# Altium PCB Board_Single.PcbDoc
Units mil, origin at the board's own origin, x right, y up, seen from the top; angles counter-clockwise.
Board outline 3629.92 x 2881.89 mil, 2 copper layers (Top Layer, Bottom Layer), stack 61.811 mil thick; 50 components, 21 nets, 218 pads, 36 vias.
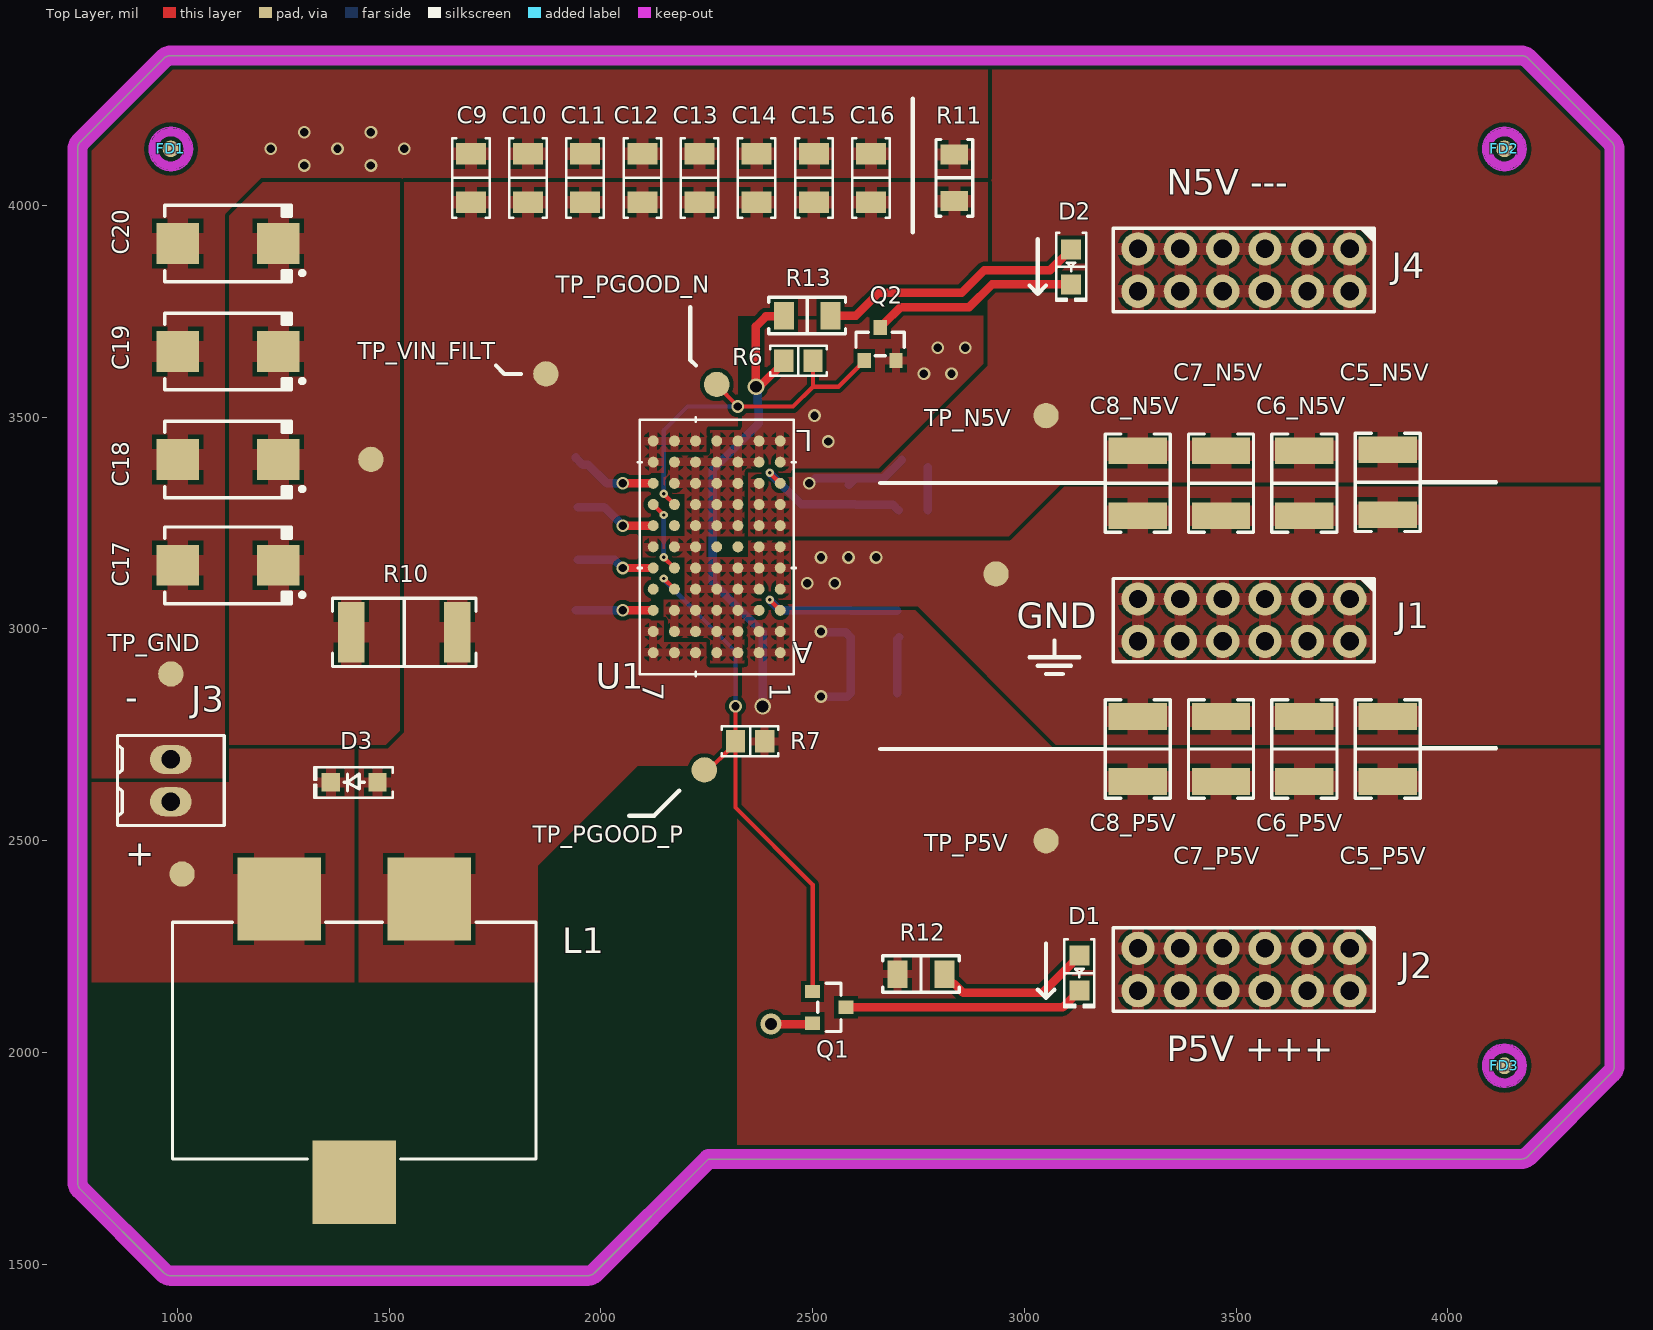
[diagram p0: Top Layer view]
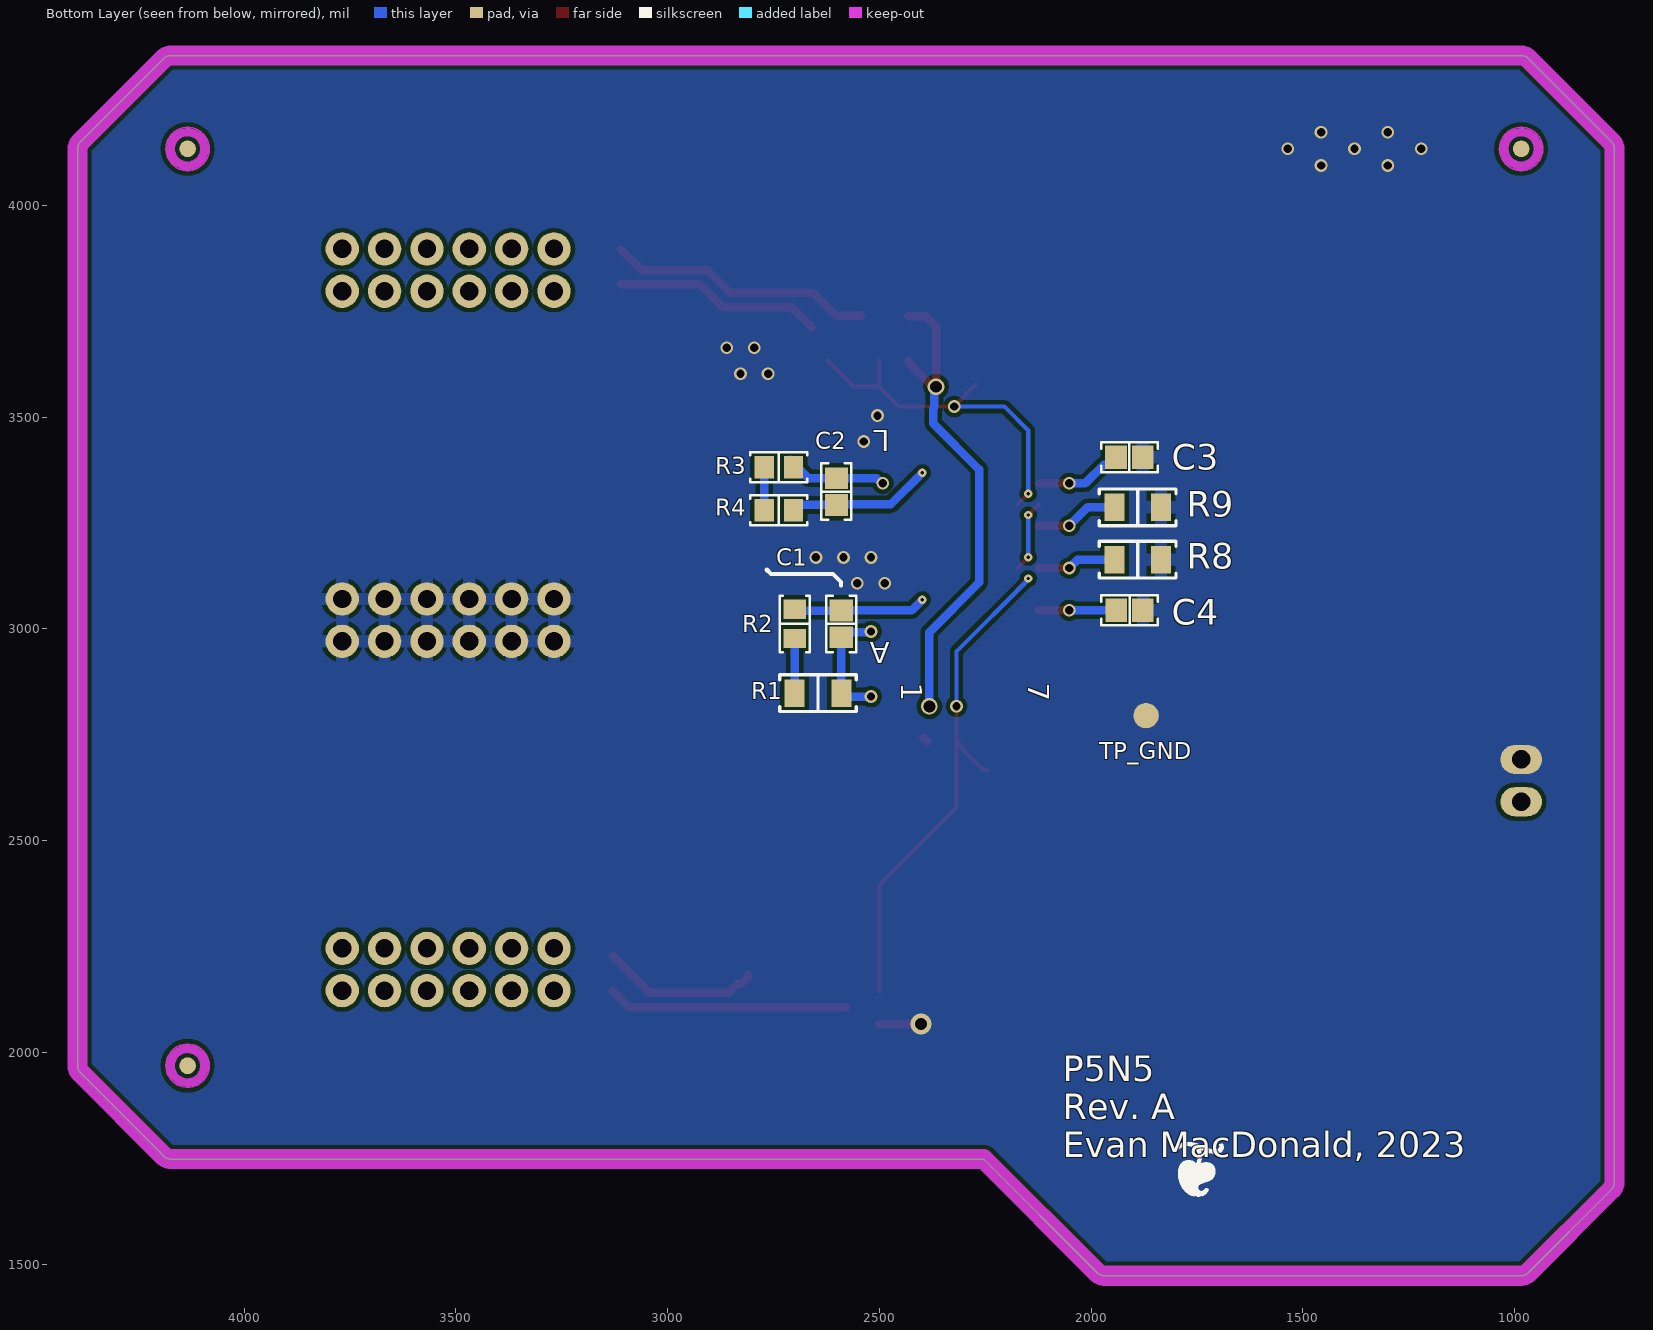
[diagram p1: Bottom Layer view, seen from below]
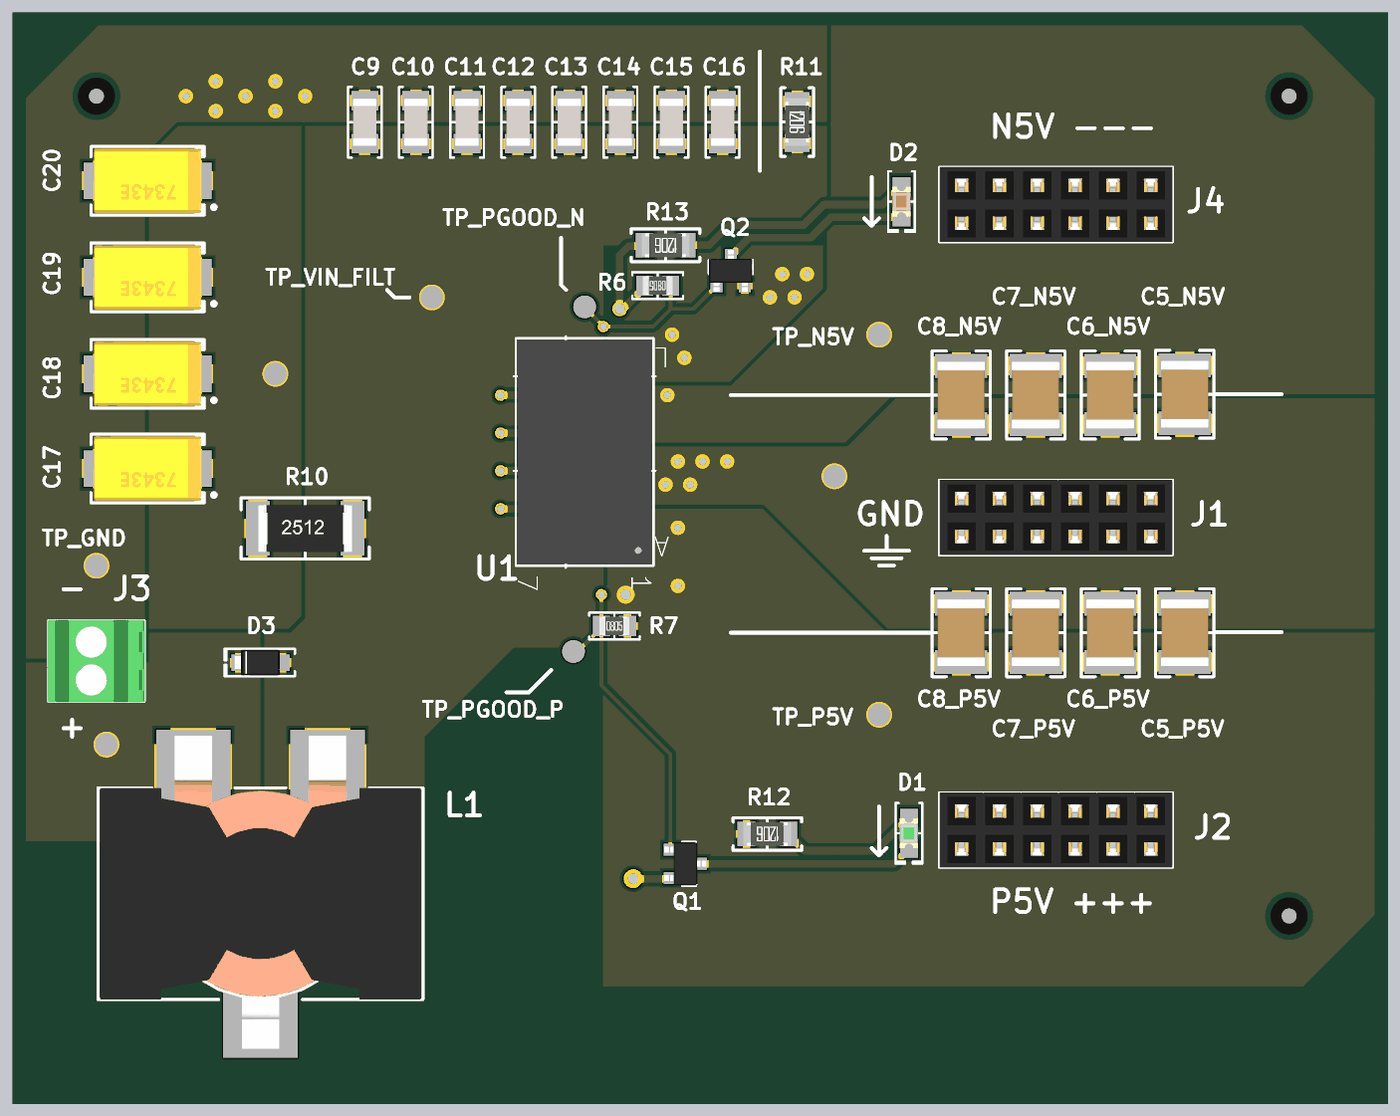
[diagram p2: 3D render of the assembled board from above, using the file's embedded part models]
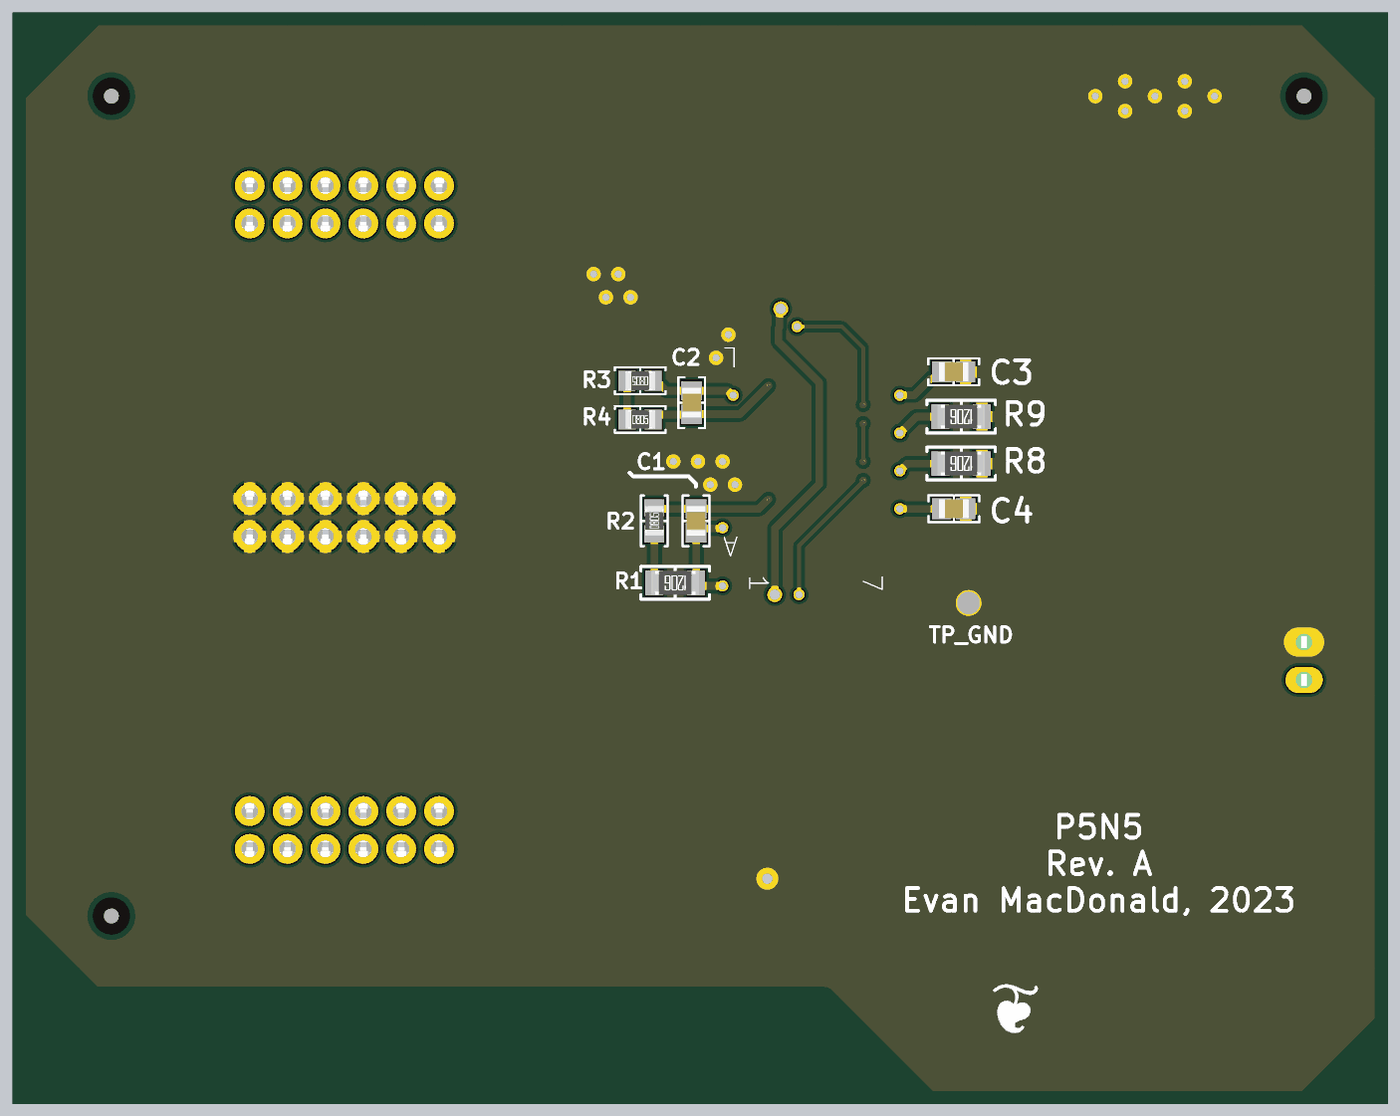
[diagram p3: 3D render of the assembled board from below, using the file's embedded part models]

## Layer stack, top to bottom
Top Solder: solder mask 0.5, Solder Resist, Dk 3.8
Top Layer: signal copper 1.378
Dielectric: core 59.0551, FR-4, Dk 4.5
Bottom Layer: signal copper 1.378
Bottom Solder: solder mask 0.5, Solder Resist, Dk 3.8

## Board outline
967.55,1479.36 770.7,1676.21 cw(c787.4,1692.91) 763.78,1692.91 763.78,4133.86 cw(c787.4,4133.86) 770.7,4150.56 967.55,4347.41 cw(c984.25,4330.71) 984.25,4354.33 4173.23,4354.33 cw(c4173.23,4330.71) 4189.93,4347.41 4386.78,4150.56 cw(c4370.08,4133.86) 4393.7,4133.86 4393.7,1968.5 cw(c4370.08,1968.5) 4386.78,1951.8 4189.93,1754.95 cw(c4173.23,1771.65) 4173.23,1748.03 2253.88,1748.03 1985.21,1479.36 cw(c1968.5,1496.06) 1968.5,1472.44 984.25,1472.44 cw(c984.25,1496.06)

## Design rules (kind name [scope] priority, off if disabled: settings)
BoardOutlineClearance [All] p1: gap=10 ignorepadtopadclearanceinfootprint=FALSE except(0: Arc-SplitContinuation Track-SplitContinuation SMDPad-SplitContinuation THPad-SplitContinuation Via-SplitContinuation Fill-SplitContinuation Poly-SplitContinuation Region-SplitContinuation Text-SplitContinuation)
Clearance [All] p1: gap=10 ignorepadtopadclearanceinfootprint=FALSE except(0: Arc-Hole Track-Hole SMDPad-Hole THPad-Hole Via-Hole Fill-Hole Poly-Hole Region-Hole Text-Hole; 5.91: SMDPad-Text)
HoleSize [All] p1: absolutevalues=TRUE maxlimit=248.03 minlimit=5.91 maxpercent=80.000 minpercent=20.000
MinimumAnnularRing [All] p1: minimumring=5.12
MinimumSolderMaskSliver [All] p1: minsoldermaskwidth=3.94
PolygonConnect [All] p1: connectstyle=Relief reliefconductorwidth=20 reliefentries=4 polygonreliefangle="90 Angle" airgapwidth=10
RoomDefinition Converter [InComponentClass('Converter') vs False] p1: confinementstyle=ConfineIn formatcopy=TRUE lockcomponents=FALSE outline 1618.94,2559.06 2885.43,2559.06 2885.43,3740.16 1618.94,3740.16
RoomDefinition TopLevel [InComponentClass('TopLevel')] p2: confinementstyle=ConfineIn formatcopy=TRUE lockcomponents=FALSE outline 472.44,1456.69 4547.24,1456.69 4547.24,4468.5 472.44,4468.5
RoomDefinition U_InputFilter [InComponentClass('U_InputFilter')] p3: confinementstyle=ConfineIn formatcopy=TRUE lockcomponents=FALSE outline 728.35,1535.43 2972.44,1535.43 2972.44,4370.08 728.35,4370.08
RoomDefinition U_LED_Feedback [InComponentClass('U_LED_Feedback')] p4: confinementstyle=ConfineIn formatcopy=TRUE lockcomponents=FALSE outline 2252.71,1948.82 3238.19,1948.82 3238.19,4015.75 2252.71,4015.75
RoomDefinition P5V [InComponentClass('P5V') vs False] p5: confinementstyle=ConfineIn formatcopy=TRUE lockcomponents=FALSE outline 3149.61,2559.06 3976.38,2559.06 3976.38,2874.02 3149.61,2874.02
RoomDefinition N5V [InComponentClass('N5V') vs False] p6: confinementstyle=ConfineIn formatcopy=TRUE lockcomponents=FALSE outline 3110.24,3188.98 4015.75,3188.98 4015.75,3543.31 3110.24,3543.31
RoutingVias [All] p1: holewidth=28 width=50 viastyle="Through Hole" minholewidth=5.91 minwidth=9.84 maxholewidth=248.03 maxwidth=257.87
SolderMaskExpansion [All] p1: expansion=4 istentingtop=FALSE
Width [All] p1: maxlimit=20 minlimit=5 preferedwidth=10 minimp=50.000000 maximp=50.000000 favimp=50.000000
28 further rules are at their usual default settings.

## Classes and differential pairs
channel class OutputFilter: N5V P5V
component class U_LED_Feedback: D1 D2 Q1 Q2 R12 R13
component class U_InputFilter: C9 C10 C11 C12 C13 C14 C15 C16 C17 C18 C19 C20 D3 L1 R10 R11
component class TopLevel: FD1 FD2 FD3 J1 J2 J3 J4
component class P5V: C5_P5V C6_P5V C7_P5V C8_P5V
component class N5V: C5_N5V C6_N5V C7_N5V C8_N5V
component class Converter: C1 C2 C3 C4 R1 R2 R3 R4 R6 R7 R8 R9 U1

## Components (designator, comment, footprint, x,y, rotation, side; value= is the part's Value field where it differs from the comment)
C1 "1000 pF" "CAP 0805_2012" 2589.76,3012 r90 bottom
C2 "1000 pF" "CAP 0805_2012" 2601.35,3324.33 r270 bottom
C3 "0.22 µF" "CAP 0805_2012" 1909.45,3405.51 r0 bottom
C4 "0.22 µF" "CAP 0805_2012" 1909.05,3044.02 r0 bottom
C5_N5V "22 µF" "CAP 1812_4532 1.1MM" 3858.27,3346.46 r90 top (schematic designator C5)
C5_P5V "22 µF" "CAP 1812_4532 1.1MM" 3858.27,2716.54 r270 top (schematic designator C5)
C6_N5V "22 µF" "CAP 1812_4532 1.1MM" 3661.42,3344.49 r90 top (schematic designator C6)
C6_P5V "22 µF" "CAP 1812_4532 1.1MM" 3661.42,2716.54 r270 top (schematic designator C6)
C7_N5V "22 µF" "CAP 1812_4532 1.1MM" 3464.57,3344.49 r90 top (schematic designator C7)
C7_P5V "22 µF" "CAP 1812_4532 1.1MM" 3464.57,2716.54 r270 top (schematic designator C7)
C8_N5V "22 µF" "CAP 1812_4532 1.1MM" 3267.72,3344.49 r90 top (schematic designator C8)
C8_P5V "22 µF" "CAP 1812_4532 1.1MM" 3267.72,2716.54 r270 top (schematic designator C8)
C9 "4.7 µF" "CAP 1206_3216 - 0.8MM" 1692.91,4065.12 r270 top
C10 "4.7 µF" "CAP 1206_3216 - 0.8MM" 1827.9,4065.12 r270 top
C11 "4.7 µF" "CAP 1206_3216 - 0.8MM" 1962.88,4065.12 r270 top
C12 "4.7 µF" "CAP 1206_3216 - 0.8MM" 2097.86,4065.12 r270 top
C13 "4.7 µF" "CAP 1206_3216 - 0.8MM" 2232.85,4065.12 r270 top
C14 "4.7 µF" "CAP 1206_3216 - 0.8MM" 2367.83,4065.12 r270 top
C15 "4.7 µF" "CAP 1206_3216 - 0.8MM" 2502.81,4065.12 r270 top
C16 "4.7 µF" "CAP 1206_3216 - 0.8MM" 2637.8,4065.12 r270 top
C17 "68 µF" "CAP POL 2917_7343" 1119.25,3150.39 r180 top
C18 "68 µF" "CAP POL 2917_7343" 1119.25,3400.39 r180 top
C19 "68 µF" "CAP POL 2917_7343" 1119.25,3655.39 r180 top
C20 "68 µF" "CAP POL 2917_7343" 1119.25,3910.39 r180 top
D1 "Green" "LED 0805_2012 GREEN" 3129.92,2187.01 r270 top
D2 "Red" "LED 0805_2012 RED" 3110.24,3855.29 r270 top
D3 "PMEG40T30ERX" SOD-123W 1417.32,2637.8 r180 top
FD1 "Fiducial Marker" FIDUCIAL 984.25,4133.86 r0 top
FD2 "Fiducial Marker" FIDUCIAL 4133.86,4133.86 r0 top
FD3 "Fiducial Marker" FIDUCIAL 4133.86,1968.5 r0 top
J1 "M20-7830642" "HARWIN M20-7830645" 3518.5,3020.87 r270 top
J2 "M20-7830642" "HARWIN M20-7830645" 3518.5,2195.66 r270 top
J3 "282834-2" "TE 282834-2" 984.25,2641.96 r90 top
J4 "M20-7830642" "HARWIN M20-7830645" 3518.5,3847.64 r270 top
L1 "47 µH" "WURTH WE-HCF 14.5MM" 1417.32,2027.56 r180 top
Q1 "BC817-40-7-F" "DIODES SOT-23-3" 2539.37,2106.3 r0 top
Q2 "BC817-40-7-F" "DIODES SOT-23-3" 2659.45,3672.89 r90 top
R1 "45.3 kOhms" "RES 1206_3216" 2644.88,2848.53 r0 bottom
R2 "270 Ohms" "RES 0805_2012" 2700,3012.04 r90 bottom
R3 "51 kOhms" "RES 0805_2012" 2737.37,3382.31 r0 bottom
R4 "9.1 kOhms" "RES 0805_2012" 2737.37,3279.92 r180 bottom
R6 "10 kOhms" "RES 0805_2012" 2466.34,3633.52 r180 top
R7 "10 kOhms" "RES 0805_2012" 2352.2,2734.33 r0 top
R8 "80.6 kOhms" "RES 1206_3216" 1889.76,3163.49 r0 bottom
R9 "80.6 kOhms" "RES 1206_3216" 1889.76,3287.4 r0 bottom
R10 "1 Ohms" "RES 2512_6432" 1535.43,2992.13 r0 top
R11 "47 kOhms" "RES 1206_3216" 2834.65,4065.31 r270 top
R12 "150 Ohms" "RES 1206_3216" 2755.91,2185.04 r180 top
R13 "150 Ohms" "RES 1206_3216" 2487.01,3740.16 r180 top
U1 "LTM8049IY" LTM8049IY_ADI 2273.46,3194.02 r180 top

## Footprints (in the part's own frame and the unit in brackets; to place one, negate y for a bottom-side part, rotate by r counter-clockwise, add the part's x,y. Pads: shape width x height; smd on the part's side, far side on the other; paste and mask are expansions set on the pad)
"CAP 0805_2012" [mm] "Chip Capacitor, 2-Leads, Body 2.00x1.20mm, IPC Medium Density"
  rect 1.3x1.4 smd: 1(-0.8,0) 2(0.8,0)
  silkscreen extent -1.7,-0.9 1.7,0.9, body extent -1,-0.64 1,0.64, height 1.26
"CAP 1206_3216 - 0.8MM" [mm] "Chip Capacitor, 2-Leads, Body 3.25x1.60mm, IPC Medium Density"
  rect 1.3x1.8 smd: 1(-1.45,0) 2(1.45,0)
  silkscreen extent -2.37,-1.12 2.37,1.12, body extent -1.6,-0.8 1.6,0.8, height 0.8
"CAP 1812_4532 1.1MM" [mm] "Chip Capacitor, 2-Leads, Body 4.50x3.20mm, IPC Medium Density"
  rect 1.6x3.5 smd: 1(-1.95,0) 2(1.95,0)
  silkscreen extent -2.95,-1.95 2.95,1.95, body extent -2.25,-1.6 2.25,1.6, height 1.1
"CAP POL 2917_7343" [mm] "Molded Capacitor, 2-Leads, Body 7.30x4.30mm, IPC Medium Density"
  rect 2.55x2.45 smd: 1(-3.025,0) 2(3.025,0)
  silkscreen extent -4.58,-2.3 3.8,2.3, body extent -3.65,-2.15 3.65,2.15, height 4.1
"DIODES SOT-23-3" [mm] "SOT23, 3-Leads, Body 2.90x2.40mm, Pitch 0.95mm, IPC Medium Density"
  rect 0.9x0.8 smd: 1(-1,0.95) 2(-1,-0.95) 3(1,0)
  silkscreen extent -0.7,-1.45 0.7,1.45, body extent -1.41,-1.45 1.41,1.45, height 1.5
FIDUCIAL [mm] "Fiducial Marker"
  round 1 smd mask+0.75: 1(0,0)
  round 1 smd far side mask+0.75: 1(0,0)
  Keep-Out Layer circle w0.1: c0,0 r1.3
  Keep-Out Layer circle w0.496: c0,0 r1.002
"HARWIN M20-7830645" [mm] "2.54mm DIL PC TAIL PIN HEADER ASSEMBLY"
  round 2 hole 1.1: 1(-1.27,6.35) 2(-1.27,3.81) 3(-1.27,1.27) 4(-1.27,-1.27) 5(-1.27,-3.81) 6(-1.27,-6.35) 7(1.27,-6.35) 8(1.27,-3.81) 9(1.27,-1.27) 10(1.27,1.27) 11(1.27,3.81) 12(1.27,6.35)
  silkscreen extent -2.5,-7.83 2.5,7.81, body extent -2.52,-7.82 2.52,7.82, height 8.5
"LED 0805_2012 GREEN" [mm] "Chip Diode, 2-Leads, Body 2.00x1.25mm, IPC Medium Density"
  rect 1.2x1.2 smd: 1(-1.05,0) 2(1.05,0)
  silkscreen extent -2.03,-0.9 2.03,0.9, body extent -1,-0.63 1,0.63, height 0.9
"LED 0805_2012 RED" [mm] "Chip Diode, 2-Leads, Body 2.00x1.25mm, IPC Medium Density"
  rect 1.2x1.2 smd: 1(-1.05,0) 2(1.05,0)
  silkscreen extent -2.03,-0.9 2.03,0.9, body extent -1,-0.62 1,0.63, height 0.9
LTM8049IY_ADI [mil]
  round 26 smd paste+0 mask+0: A1(-150,250) A2(-100,250) A5(50,250) A6(100,250) A7(150,250) B1(-150,200) B2(-100,200) B7(150,200) C1(-150,150) C2(-100,150) C7(150,150) D1(-150,100) D2(-100,100) D6(100,100) D7(150,100) E1(-150,50) E2(-100,50) E6(100,50) E7(150,50) F3(-50,0) F4(0,0) G1(-150,-50) G2(-100,-50) G6(100,-50) G7(150,-50) H1(-150,-100) H2(-100,-100) H6(100,-100) H7(150,-100) J1(-150,-150) J2(-100,-150) J7(150,-150) K1(-150,-200) K2(-100,-200) K7(150,-200) L1(-150,-250) L2(-100,-250) L5(50,-250) L6(100,-250) L7(150,-250) R(-150,0) R(-100,0) R(-50,250) R(-50,150) R(-50,200) R(-50,100) R(-50,50) R(-50,-50) R(-50,-100) R(-50,-200) R(-50,-150) R(-50,-250) R(0,250) R(0,200) R(0,150) R(0,100) R(0,50) R(0,-50) R(0,-100) R(0,-150) R(0,-200) R(0,-250) R(50,150) R(50,200) R(50,100) R(50,50) R(50,0) R(50,-50) R(50,-100) R(50,-200) R(50,-150) R(100,200) R(100,150) R(100,0) R(100,-150) R(100,-200) R(150,0)
  silkscreen extent -187,-306 187,306, body extent -177,-296 177,296, height 103
"RES 0805_2012" [mm] "Chip Resistor, 2-Leads, Body 2.00x1.25mm, IPC Medium Density"
  rect 1.15x1.35 smd: 1(-0.875,0) 2(0.875,0)
  silkscreen extent -1.7,-0.9 1.7,0.9, body extent -1,-0.62 1,0.63, height 0.6
"RES 1206_3216" [mm] "Chip Resistor, 2-Leads, Body 3.13x1.55mm, IPC Medium Density"
  rect 1.2x1.65 smd: 1(-1.4,0) 2(1.4,0)
  silkscreen extent -2.3,-1.1 2.3,1.1, body extent -1.6,-0.8 1.6,0.8, height 0.6
"RES 2512_6432" [mm] "Chip Resistor, 2-Leads, Body 6.30x3.15mm, IPC Medium Density"
  rect 1.6x3.65 smd: 1(-3.175,0) 2(3.175,0)
  silkscreen extent -4.3,-2.05 4.3,2.05, body extent -3.15,-1.57 3.15,1.57, height 0.7
SOD-123W [mm] "SODFL, 2-Leads, Body 1.60x3.50mm, IPC Medium Density"
  rect 1.1x1.1 smd: 1(-1.4,0) 2(1.4,0)
  silkscreen extent -2.31,-0.92 2.41,0.92, body extent -1.75,-0.87 1.75,0.87, height 0.95
"TE 282834-2" [mm]
  oval 1.75x2.5 hole 1.1: 1(-1.27,0) 2(1.27,0)
  silkscreen extent -2.7,-3.2 2.7,3.2, body extent -2.77,-3.25 2.77,3.25, height 10
"WURTH WE-HCF 14.5MM" [mm] "SMD High Current Inductor, body 21.8x14.2mm"
  rect 5x5 smd: 1(-4.5,-8.5) 2(4.5,-8.5) 3(0,8.5)
  silkscreen extent -10.9,-7.1 10.9,7.1, body extent -10.75,-10.6 10.75,10.4, height 14

## Part data
C1 C2: library part C0805C102J5RAC7800, "CAP CER 1000PF 50V X7R 0805", Device Package="0805 (2012 Metric)", manufacturer=KEMET, Operating Temperature="-55°C ~ 125°C", Part Number=C0805C102J5RACTU, Supplier Part Number 1=399-C0805C102J5RAC7800CT-ND, Temperature Coefficient=X7R, Tolerance=±5%, Voltage - Rated=50V, Applications="Bypass, Decoupling", Capacitance="1000 pF", componentlink1description=Datasheet, componentlink1url=https://api.kemet.com/component-edge/download/datasheet/C0805C102J5RACTU.pdf, componentlink2description="DigiKey Link", componentlink2url=https://www.digikey.com/en/products/detail/kemet/C0805C102J5RAC7800/411148, lastupdated="7/15/2023 7:10:24 PM", Lifecycle Status=Active, Minimum Order=1, Mounting Type="Surface Mount, MLCC", Package / Case="0805 (2012 Metric)", packaging=TapeAndReel, Part Status=Active, partid=32561, price=0.01, series="SMD Comm X7R", Size / Dimension="0.079\" L x 0.049\" W (2.00mm x 1.25mm)", Supplier 1=DigiKey, Thickness (Max)="0.035\" (0.88mm)"
C3 C4: library part C0805C224K5RAC7800, "CAP CER 0.22UF 50V X7R 0805", Device Package="0805 (2012 Metric)", manufacturer=KEMET, Operating Temperature="-55°C ~ 125°C", Part Number=C0805C224K5RACTU, Supplier Part Number 1=399-C0805C224K5RACTUCT-ND, Temperature Coefficient=X7R, Tolerance=±10%, Voltage - Rated=50V, Applications="Bypass, Decoupling", Capacitance="0.22 µF", componentlink1description=Datasheet, componentlink1url=https://api.kemet.com/component-edge/download/datasheet/C0805C224K5RACTU.pdf, componentlink2description="DigiKey Link", componentlink2url=https://www.digikey.com/en/products/detail/kemet/C0805C224K5RAC7800/754753, lastupdated="7/15/2023 7:10:33 PM", Lifecycle Status=Active, Minimum Order=1, Mounting Type="Surface Mount, MLCC", Package / Case="0805 (2012 Metric)", packaging=TapeAndReel, Part Status=Active, partid=33070, price=0.02, series="SMD Comm X7R", Size / Dimension="0.079\" L x 0.049\" W (2.00mm x 1.25mm)", Supplier 1=DigiKey, Thickness (Max)="0.055\" (1.40mm)"
C5_N5V C5_P5V C6_N5V C6_P5V C7_N5V C7_P5V C8_N5V C8_P5V: library part CGA8P1X7R1E226M250KC, "CAP CER 22UF 25V X7R 1812", Device Package="1812 (4532 Metric)", manufacturer="TDK Corporation", Operating Temperature="-55°C ~ 125°C", Ratings=AEC-Q200, Supplier Part Number 1=445-7910-1-ND, Temperature Coefficient=X7R, Tolerance=±20%, Voltage - Rated=25V, Applications=Automotive, Capacitance="22 µF", componentlink1description=Datasheet, componentlink1url=https://product.tdk.com/info/en/catalog/datasheets/mlcc_automotive_general_en.pdf?ref_disty=digikey, componentlink2description="DigiKey Link", componentlink2url=https://www.digikey.com/en/products/detail/tdk-corporation/CGA8P1X7R1E226M250KC/2781336, lastupdated="7/15/2023 7:18:32 PM", Lifecycle Status=Active, Minimum Order=1, Mounting Type="Surface Mount, MLCC", Package / Case="1812 (4532 Metric)", packaging=TapeAndReel, Part Number=CGA8P1X7R1E226M250KC, Part Status=Active, price=0.42, series=CGA, Size / Dimension="0.177\" L x 0.126\" W (4.50mm x 3.20mm)", Supplier 1=DigiKey, Thickness (Max)="0.110\" (2.80mm)"
C9 C10 C11 C12 C13 C14 C15 C16: library part C1206C475K5RAC7800, "CAP CER 4.7UF 50V X7R 1206", Device Package="1206 (3216 Metric)", manufacturer=KEMET, Operating Temperature="-55°C ~ 125°C", Part Number=C1206C475K5RACTU, Supplier Part Number 1=399-C1206C475K5RAC7800CT-ND, Temperature Coefficient=X7R, Tolerance=±10%, Voltage - Rated=50V, Applications="Bypass, Decoupling", Capacitance="4.7 µF", componentlink1description=Datasheet, componentlink1url=https://api.kemet.com/component-edge/download/datasheet/C1206C475K5RACTU.pdf, componentlink2description="DigiKey Link", componentlink2url=https://www.digikey.com/en/products/detail/kemet/C1206C475K5RAC7800/5119822, lastupdated="7/15/2023 7:14:03 PM", Lifecycle Status=Active, Minimum Order=1, Mounting Type="Surface Mount, MLCC", Package / Case="1206 (3216 Metric)", packaging=TapeAndReel, Part Status=Active, partid=38858, price=0.07, series="SMD Comm X7R", Size / Dimension="0.126\" L x 0.063\" W (3.20mm x 1.60mm)", Supplier 1=DigiKey, Thickness (Max)="0.071\" (1.80mm)"
C17 C18 C19 C20: library part T491X686K025AT, "CAP TANT 68UF 10% 25V 2917", Device Package="2917 (7343 Metric)", ESR (Equivalent Series Resistance)=700mOhm, Lifetime @ Temp.="2000 Hrs @ 125°C", manufacturer=KEMET, Manufacturer Size Code=X, Operating Temperature="-55°C ~ 125°C", Supplier Part Number 1=399-8424-1-ND, Tolerance=±10%, Voltage - Rated="25 V", Capacitance="68 µF", componentlink1description=Datasheet, componentlink1url=https://api.kemet.com/component-edge/download/datasheet/T491X686K025AT.pdf, componentlink2description="DigiKey Link", componentlink2url=https://www.digikey.com/en/products/detail/kemet/T491X686K025AT/2336396, Features="General Purpose", Height - Seated (Max)="0.169\" (4.30mm)", lastupdated="7/13/2023 7:40:28 PM", Lifecycle Status=Active, Minimum Order=1, Mounting Type="Surface Mount", Package / Case="2917 (7343 Metric)", packaging=TapeAndReel, Part Number=T491X686K025AT, Part Status=Active, partid=3138, price=0.74, series=T491, Size / Dimension="0.287\" L x 0.169\" W (7.30mm x 4.30mm)", Supplier 1=DigiKey, Type=Molded
D1: library part CMD17-21VGD/TR8, "LED GREEN DIFFUSED 0805 SMD", Current - Test=20mA, Device Package="0805 (2012 Metric)", manufacturer="Visual Communications Company - VCC", Millicandela Rating=7mcd, Supplier Device Package=0805, Supplier Part Number 1=L62505CT-ND, Voltage - Forward (Vf) (Typ)=2.1V, Color=Green, componentlink1description=Datasheet, componentlink1url=https://vcclite.com/wp-content/uploads/wpallimport/files/files/CMD1721Seriesver3.pdf, componentlink2description="DigiKey Link", componentlink2url=https://www.digikey.com/en/products/detail/visual-communications-company-vcc/CMD17-21VGD-TR8/254855, Configuration=Standard, Height (Max)=1.20mm, lastupdated="7/12/2023 8:17:31 PM", Lens Color=Green, Lens Size="1.40mm x 1.25mm", Lens Style="Rectangle with Flat Top", Lens Transparency=Diffused, Lifecycle Status=Active, Minimum Order=1, Mounting Type="Surface Mount", Package / Case="0805 (2012 Metric)", packaging=TapeAndReel, Part Number=CMD17-21VGD/TR8, Part Status=Active, partid=299, price=0.19, series=CMD17-21, Size / Dimension="2.00mm L x 1.25mm W", Supplier 1=DigiKey, Viewing Angle=140°, Wavelength - Peak=570nm
D2: library part CMD17-21VRD/TR8, "LED RED DIFFUSED 0805 SMD", Current - Test=20mA, Device Package="0805 (2012 Metric)", manufacturer="Visual Communications Company - VCC", Millicandela Rating=6mcd, Supplier Device Package=0805, Supplier Part Number 1=L62501CT-ND, Voltage - Forward (Vf) (Typ)=2V, Color=Red, componentlink1description=Datasheet, componentlink1url=https://vcclite.com/wp-content/uploads/wpallimport/files/files/CMD1721Seriesver3.pdf, componentlink2description="DigiKey Link", componentlink2url=https://www.digikey.com/en/products/detail/visual-communications-company-vcc/CMD17-21VRD-TR8/254853, Configuration=Standard, Height (Max)=1.20mm, lastupdated="7/12/2023 8:17:11 PM", Lens Color=Red, Lens Size="1.40mm x 1.25mm", Lens Style="Rectangle with Flat Top", Lens Transparency=Diffused, Lifecycle Status=Active, Minimum Order=1, Mounting Type="Surface Mount", Package / Case="0805 (2012 Metric)", packaging=TapeAndReel, Part Number=CMD17-21VRD/TR8, Part Status=Active, partid=366, price=0.21, series=CMD17-21, Size / Dimension="2.00mm L x 1.25mm W", Supplier 1=DigiKey, Viewing Angle=140°, Wavelength - Peak=640nm
D3: "DIODE SCHOTTKY 40V 3A SOD123W", Capacitance @ Vr, F="560pF @ 1V, 1MHz", Current - Average Rectified (Io)=3A, Current - Reverse Leakage @ Vr="28 µA @ 40 V", manufacturer="Nexperia USA Inc.", Operating Temperature - Junction="175°C (Max)", Package / Case=SOD-123W, Supplier Part Number 1=1727-7481-1-ND, Voltage - DC Reverse (Vr) (Max)="40 V", Voltage - Forward (Vf) (Max) @ If="460 mV @ 3 A", componentlink1description=Datasheet, componentlink1url=https://assets.nexperia.com/documents/data-sheet/PMEG40T30ER.pdf, componentlink2description="DigiKey Link", componentlink2url=https://www.digikey.com/en/products/detail/nexperia-usa-inc/PMEG40T30ERX/7794686, Diode Type=Schottky, lastupdated="8/5/2023 9:09:43 PM", Lifecycle Status=Active, Minimum Order=1, Mounting Type="Surface Mount", packaging=TapeAndReel, Part Number=PMEG40T30ERX, Part Status=Active, partid=3171, price=0.10, Reverse Recovery Time (trr)="18 ns", series="Automotive, AEC-Q101", Speed="Fast Recovery =< 500ns, > 200mA (Io)", Supplier 1=DigiKey, Supplier Device Package=SOD-123W
FD1 FD2 FD3: library part Fiducial
J1 J2 J4: "CONN RCPT 12POS 0.1 GOLD PCB", Current Rating (Amps)=3A, Insulation Color=Black, manufacturer="Harwin Inc.", Material Flammability Rating="UL94 V-0", Operating Temperature="-40°C ~ 105°C", Supplier Part Number 1=952-1805-ND, componentlink1description=Datasheet, componentlink1url=https://cdn.harwin.com/pdfs/C001XX_M20_Series_Connectors.pdf, componentlink2description="DigiKey Link", componentlink2url=https://www.digikey.com/en/products/detail/harwin-inc/M20-7830642/3727774, Connector Type=Receptacle, Contact Finish - Mating=Gold, Contact Finish - Post=Tin, Contact Finish Thickness - Mating=Flash, Contact Length - Post="0.118\" (3.00mm)", Contact Type="Female Socket", Fastening Type=Push-Pull, Insulation Height="0.335\" (8.51mm)", lastupdated="9/21/2022 7:05:46 PM", Lifecycle Status=Active, Mated Stacking Heights="11.04mm, 12.63mm", Minimum Order=1, Mounting Type="Through Hole", Number of Positions=12, Number of Positions Loaded=All, Number of Rows=2, packaging=Tube, Part Number=M20-7830642, Part Status=Active, Pitch - Mating="0.100\" (2.54mm)", price=0.96, Row Spacing - Mating="0.100\" (2.54mm)", series=M20, Style="Board to Board or Cable", Supplier 1=DigiKey, Termination=Solder
J3: "TERM BLK 2P SIDE ENT 2.54MM PCB", Color=Green, Current=10A, manufacturer="TE Connectivity AMP Connectors", Supplier Part Number 1=A98333-ND, Voltage=150V, componentlink1description=Datasheet, componentlink1url=https://www.te.com/commerce/DocumentDelivery/DDEController?Action=srchrtrv&DocNm=282834&DocType=Customer+Drawing&DocLang=English, componentlink2description="DigiKey Link", componentlink2url=http://digikey.com/product-detail/en/te-connectivity-amp-connectors/282834-2/A98333-ND/1150135, lastupdated="1/15/2020 4:15:38 AM", Lifecycle Status=Active, Mating Orientation="Horizontal with Board", Minimum Order=1, Mounting Type="Through Hole", Number of Levels=1, packaging=Bulk, Part Number=282834-2, Part Status=Active, Pitch="0.100\" (2.54mm)", Positions Per Level=2, price=0.88, series=Buchanan, Supplier 1=DigiKey, Wire Gauge="16-30 AWG", Wire Termination="Screw - Rising Cage Clamp"
L1: library part 7443634700, "FIXED IND 47UH 12A 12.2 MOHM SMD", Current - Saturation=8.5A, Current Rating (Amps)="12 A", DC Resistance (DCR)=12.2mOhm, Device Package=Nonstandard, Frequency - Self Resonant=10MHz, Inductance Frequency - Test="100 kHz", manufacturer="Würth Elektronik", Operating Temperature="-40°C ~ 125°C", Ratings=AEC-Q200, Supplier Part Number 1=732-2525-1-ND, Tolerance=±15%, componentlink1description=Datasheet, componentlink1url=https://katalog.we-online.de/pbs/datasheet/7443634700.pdf, componentlink2description="DigiKey Link", componentlink2url=https://www.digikey.com/en/products/detail/würth-elektronik/7443634700/2440342, Height - Seated (Max)="0.571\" (14.50mm)", Inductance="47 µH", lastupdated="7/12/2023 8:30:57 PM", Lifecycle Status=Active, Material - Core="Manganese Zinc Ferrite (MnZn)", Minimum Order=1, Mounting Type="Surface Mount", Package / Case=Nonstandard, packaging=TapeAndReel, Part Number=7443634700, Part Status=Active, partid=3230, price=4.84, series=WE-HCF, Shielding=Shielded, Size / Dimension="0.858\" L x 0.846\" W (21.80mm x 21.50mm)", Supplier 1=DigiKey, Type="Drum Core, Wirewound"
Q1 Q2: "TRANS NPN 45V 0.5A SOT23-3", Current - Collector (Ic) (Max)="500 mA", Current - Collector Cutoff (Max)=100nA, DC Current Gain (hFE) (Min) @ Ic, Vce="250 @ 100mA, 1V", Frequency - Transition=100MHz, manufacturer="Diodes Incorporated", Operating Temperature="-65°C ~ 150°C (TJ)", Package / Case="TO-236-3, SC-59, SOT-23-3", Power - Max="310 mW", Supplier Device Package=SOT-23-3, Supplier Part Number 1=BC817-40FDICT-ND, Voltage - Collector Emitter Breakdown (Max)="45 V", componentlink1description=Datasheet, componentlink1url=https://www.diodes.com/assets/Datasheets/ds11107.pdf, componentlink2description="DigiKey Link", componentlink2url=https://www.digikey.com/en/products/detail/diodes-incorporated/BC817-40-7-F/814998, lastupdated="8/6/2023 9:15:11 PM", Lifecycle Status=Active, Minimum Order=1, Mounting Type="Surface Mount", packaging=TapeAndReel, Part Number=BC817-40-7-F, Part Status=Active, partid=116, price=0.02, series="Automotive, AEC-Q101", Supplier 1=DigiKey, Transistor Type=NPN, Vce Saturation (Max) @ Ib, Ic="700mV @ 50mA, 500mA"
R1: library part ERA-8ARW4532V, "RES SMD 45.3KOHM 0.05% 1/4W 1206", Device Package="1206 (3216 Metric)", manufacturer="Panasonic Electronic Components", Operating Temperature="-55°C ~ 155°C", Power (Watts)="0.25W, 1/4W", Ratings=AEC-Q200, Supplier Device Package=1206, Supplier Part Number 1=P18856CT-ND, Temperature Coefficient=±10ppm/°C, Tolerance=±0.05%, componentlink1description=Datasheet, componentlink1url=https://industrial.panasonic.com/cdbs/www-data/pdf/RDM0000/AOA0000C307.pdf, componentlink2description="DigiKey Link", componentlink2url=https://www.digikey.com/en/products/detail/panasonic-electronic-components/ERA-8ARW4532V/5163072, Composition="Thin Film", Features="Automotive AEC-Q200", Height - Seated (Max)="0.028\" (0.70mm)", lastupdated="7/13/2023 7:33:23 PM", Lifecycle Status=Active, Minimum Order=1, Number of Terminations=2, Package / Case="1206 (3216 Metric)", packaging=TapeAndReel, Part Number=ERA-8ARW4532V, Part Status=Active, partid=46049, price=0.56, Resistance="45.3 kOhms", series=ERA-8A, Size / Dimension="0.126\" L x 0.063\" W (3.20mm x 1.60mm)", Supplier 1=DigiKey
R2: library part ERJ-PB6B2700V, "RES SMD 270 OHM 0.1% 1/4W 0805", Device Package="0805 (2012 Metric)", manufacturer="Panasonic Electronic Components", Operating Temperature="-55°C ~ 155°C", Power (Watts)="0.25W, 1/4W", Ratings=AEC-Q200, Supplier Device Package=0805, Supplier Part Number 1=P20527CT-ND, Temperature Coefficient=±50ppm/°C, Tolerance=±0.1%, componentlink1description=Datasheet, componentlink1url=https://industrial.panasonic.com/cdbs/www-data/pdf/RDM0000/AOA0000C328.pdf, componentlink2description="DigiKey Link", componentlink2url=https://www.digikey.com/en/products/detail/panasonic-electronic-components/ERJ-PB6B2700V/6213310, Composition="Thick Film", Features="Automotive AEC-Q200, Pulse Withstanding", Height - Seated (Max)="0.028\" (0.70mm)", lastupdated="8/6/2023 8:08:39 PM", Lifecycle Status=Active, Minimum Order=1, Number of Terminations=2, Package / Case="0805 (2012 Metric)", packaging=TapeAndReel, Part Number=ERJ-PB6B2700V, Part Status=Active, partid=31052, price=0.04, Resistance="270 Ohms", series=ERJ-PB6, Size / Dimension="0.079\" L x 0.049\" W (2.00mm x 1.25mm)", Supplier 1=DigiKey
R3: library part TNPW080551K0BEEA, "RES 51K OHM 0.1% 1/8W 0805", Device Package="0805 (2012 Metric)", manufacturer="Vishay Dale", Operating Temperature="-55°C ~ 155°C", Power (Watts)="0.125W, 1/8W", Ratings=AEC-Q200, Supplier Device Package=0805, Supplier Part Number 1=541-3220-1-ND, Temperature Coefficient=±25ppm/°C, Tolerance=±0.1%, componentlink1description=Datasheet, componentlink1url=http://www.vishay.com/docs/28758/tnpw_e3.pdf, componentlink2description="DigiKey Link", componentlink2url=https://www.digikey.com/en/products/detail/vishay-dale/TNPW080551K0BEEA/1607476, Composition="Thin Film", Features="Anti-Sulfur, Automotive AEC-Q200, Moisture Resistant", Height - Seated (Max)="0.022\" (0.55mm)", lastupdated="8/6/2023 8:07:38 PM", Lifecycle Status=Active, Minimum Order=1, Number of Terminations=2, Package / Case="0805 (2012 Metric)", packaging=TapeAndReel, Part Number=TNPW080551K0BEEA, Part Status=Active, partid=45487, price=0.16, Resistance="51 kOhms", series="TNPW e3", Size / Dimension="0.079\" L x 0.049\" W (2.00mm x 1.25mm)", Supplier 1=DigiKey
R4: library part TNPW08059K10BEEA, "RES 9.1K OHM 0.1% 1/8W 0805", Device Package="0805 (2012 Metric)", manufacturer="Vishay Dale", Operating Temperature="-55°C ~ 155°C", Power (Watts)="0.2W, 1/5W", Ratings=AEC-Q200, Supplier Device Package=0805, Supplier Part Number 1=541-9869-1-ND, Temperature Coefficient=±25ppm/°C, Tolerance=±0.1%, componentlink1description=Datasheet, componentlink1url=http://www.vishay.com/docs/28758/tnpw_e3.pdf, componentlink2description="DigiKey Link", componentlink2url=http://digikey.com/product-detail/en/vishay-dale/TNPW08059K10BEEA/541-9869-1-ND/9659137, Composition="Thin Film", Features="Anti-Sulfur, Automotive AEC-Q200, Moisture Resistant", Height - Seated (Max)="0.022\" (0.55mm)", lastupdated="8/6/2023 8:07:38 PM", Lifecycle Status=Active, Minimum Order=1, Number of Terminations=2, Package / Case="0805 (2012 Metric)", packaging=TapeAndReel, Part Number=TNPW08059K10BEEA, Part Status=Active, partid=45465, price=0.18, Resistance="9.1 kOhms", series="TNPW e3", Size / Dimension="0.079\" L x 0.049\" W (2.00mm x 1.25mm)", Supplier 1=DigiKey
R6 R7: library part RT0805FRE1310KL, "RES 10K OHM 1% 1/8W 0805", Device Package="0805 (2012 Metric)", manufacturer=Yageo, Operating Temperature="-55°C ~ 155°C", Power (Watts)="0.125W, 1/8W", Supplier Device Package=0805, Supplier Part Number 1=13-RT0805FRE1310KLCT-ND, Temperature Coefficient=±50ppm/°C, Tolerance=±1%, componentlink1description=Datasheet, componentlink1url=https://www.yageo.com/upload/media/product/productsearch/datasheet/rchip/PYu-RT_1-to-0.01_RoHS_L_13.pdf, componentlink2description="DigiKey Link", componentlink2url=https://www.digikey.com/en/products/detail/yageo/RT0805FRE1310KL/16982152, Composition="Thin Film", Features="Moisture Resistant", Height - Seated (Max)="0.024\" (0.60mm)", lastupdated="7/12/2023 7:50:22 PM", Lifecycle Status=Active, Minimum Order=1, Number of Terminations=2, Package / Case="0805 (2012 Metric)", packaging=TapeAndReel, Part Number=RT0805FRE1310KL, Part Status=Active, partid=76856, price=0.01, Resistance="10 kOhms", series=RT, Size / Dimension="0.079\" L x 0.049\" W (2.00mm x 1.25mm)", Supplier 1=DigiKey
R8 R9: library part ERA-8AEB8062V, "RES SMD 80.6K OHM 0.1% 1/4W 1206", Device Package="1206 (3216 Metric)", manufacturer="Panasonic Electronic Components", Operating Temperature="-55°C ~ 155°C", Power (Watts)="0.25W, 1/4W", Ratings=AEC-Q200, Supplier Device Package=1206, Supplier Part Number 1=P80.6KBCCT-ND, Temperature Coefficient=±25ppm/°C, Tolerance=±0.1%, componentlink1description=Datasheet, componentlink1url=https://industrial.panasonic.com/cdbs/www-data/pdf/RDM0000/AOA0000C307.pdf, componentlink2description="DigiKey Link", componentlink2url=https://www.digikey.com/en/products/detail/panasonic-electronic-components/ERA-8AEB8062V/3071179, Composition="Thin Film", Features="Automotive AEC-Q200", Height - Seated (Max)="0.028\" (0.70mm)", lastupdated="8/5/2023 7:52:37 PM", Lifecycle Status=Active, Minimum Order=1, Number of Terminations=2, Package / Case="1206 (3216 Metric)", packaging=TapeAndReel, Part Number=ERA-8AEB8062V, Part Status=Active, partid=42629, price=0.10, Resistance="80.6 kOhms", series=ERA-8A, Size / Dimension="0.126\" L x 0.063\" W (3.20mm x 1.60mm)", Supplier 1=DigiKey
R10: library part RHC2512FT1R00, "RES 1 OHM 1% 2W 2512", Device Package="2512 (6432 Metric)", manufacturer="Stackpole Electronics Inc", Operating Temperature="-55°C ~ 155°C", Power (Watts)=2W, Supplier Device Package=2512, Supplier Part Number 1=RHC2512FT1R00CT-ND, Temperature Coefficient=±100ppm/°C, Tolerance=±1%, componentlink1description=Datasheet, componentlink1url=https://www.seielect.com/catalog/sei-rhc.pdf, componentlink2description="DigiKey Link", componentlink2url=https://www.digikey.com/en/products/detail/stackpole-electronics-inc/RHC2512FT1R00/1646034, Composition="Thick Film", Features="Moisture Resistant", Height - Seated (Max)="0.028\" (0.70mm)", lastupdated="2/17/2022 6:29:24 PM", Lifecycle Status=Active, Minimum Order=1, Number of Terminations=2, Package / Case="2512 (6432 Metric)", packaging=TapeAndReel, Part Number=RHC2512FT1R00, Part Status=Active, price=0.35, Resistance="1 Ohms", series=RHC, Size / Dimension="0.248\" L x 0.126\" W (6.30mm x 3.20mm)", Supplier 1=DigiKey
R11: library part CRCW120647K0FKEA, "RES SMD 47K OHM 1% 1/4W 1206", Device Package="1206 (3216 Metric)", manufacturer="Vishay Dale", Operating Temperature="-55°C ~ 155°C", Power (Watts)="0.25W, 1/4W", Ratings=AEC-Q200, Supplier Device Package=1206, Supplier Part Number 1=541-47.0KFCT-ND, Temperature Coefficient=±100ppm/°C, Tolerance=±1%, componentlink1description=Datasheet, componentlink1url=http://www.vishay.com/docs/20035/dcrcwe3.pdf, componentlink2description="DigiKey Link", componentlink2url=https://www.digikey.com/en/products/detail/vishay-dale/CRCW120647K0FKEA/1176834, Composition="Thick Film", Features="Automotive AEC-Q200", Height - Seated (Max)="0.024\" (0.60mm)", lastupdated="8/5/2023 7:53:13 PM", Lifecycle Status=Active, Minimum Order=1, Number of Terminations=2, Package / Case="1206 (3216 Metric)", packaging=TapeAndReel, Part Number=CRCW120647K0FKEA, Part Status=Active, partid=33069, price=0.01, Resistance="47 kOhms", series=CRCW, Size / Dimension="0.126\" L x 0.063\" W (3.20mm x 1.60mm)", Supplier 1=DigiKey
R12 R13: library part RT1206FRE07150RL, "RES SMD 150 OHM 1% 1/4W 1206", Device Package="1206 (3216 Metric)", manufacturer=Yageo, Operating Temperature="-55°C ~ 155°C", Power (Watts)="0.25W, 1/4W", Supplier Device Package=1206, Supplier Part Number 1=13-RT1206FRE07150RLCT-ND, Temperature Coefficient=±50ppm/°C, Tolerance=±1%, componentlink1description=Datasheet, componentlink1url=https://www.yageo.com/upload/media/product/productsearch/datasheet/rchip/PYu-RT_1-to-0.01_RoHS_L_12.pdf, componentlink2description="DigiKey Link", componentlink2url=https://www.digikey.com/en/products/detail/yageo/RT1206FRE07150RL/1082930, Composition="Thin Film", Height - Seated (Max)="0.026\" (0.65mm)", lastupdated="7/12/2023 7:42:26 PM", Lifecycle Status=Active, Minimum Order=1, Number of Terminations=2, Package / Case="1206 (3216 Metric)", packaging=TapeAndReel, Part Number=RT1206FRE07150RL, Part Status=Active, partid=66998, price=0.01, Resistance="150 Ohms", series=RT, Size / Dimension="0.122\" L x 0.063\" W (3.10mm x 1.60mm)", Supplier 1=DigiKey
U1: "No Description Available", manufacturer="Analog Devices Inc", Part Number=LTM8049IY, RefDes=RefDes, Type=Type

## Free pads (board coordinates)
  round 60 smd: 2(984.25,2893.7) 2(1010.62,2421.26) 2(1456.69,3400.39) 2(1870.08,3602.36) 2(2244.09,2667.04) 2(2273.46,3577.47) 2(2933.07,3129.92) 2(3051.18,2500) 2(3051.18,3503.94)
  round 60 smd far side: 2(1870.08,2795.28)

## Via types
v1: diameter 30, hole 19.68, Top Layer to Bottom Layer, 27 vias
v2: diameter 19.68, hole 7.87, Top Layer to Bottom Layer, tented both sides, 6 vias
v3: diameter 39.37, hole 28, Top Layer to Bottom Layer, 2 vias
v4: diameter 50, hole 28, Top Layer to Bottom Layer, 1 vias

## Nets (pads, with @x,y where several pads share a name; then routed paths per layer and width w, separated by ;. In a path a pad name is that pad's centre, name@x,y a point inside that pad or via, vN(x,y) a via of type N, cw(c..) or ccw(c..) an arc to the next point about the centre after c; other vN are vias at no path point)
GND: C3.1 C4.1 C5_N5V.1 C5_P5V.1 C6_N5V.1 C6_P5V.1 C7_N5V.1 C7_P5V.1 C8_N5V.1 C8_P5V.1 C9.1 C10.1 C11.1 C12.1 C13.1 C14.1 C15.1 C16.1 C17.2 C18.2 C19.2 C20.2 J1.1 J1.2 J1.3 J1.4 J1.5 J1.6 J1.7 J1.8 J1.9 J1.10 J1.11 J1.12 J3.2 pad.2@984.25,2893.7 pad.2@1870.08,2795.28 pad.2@2933.07,3129.92 Q1.2 Q2.2 R8.1 R9.1 R11.1 U1.C2 U1.D1 U1.D2 U1.E1 U1.E2 U1.K1 U1.K2 U1.L1 U1.L2 U1.R | length 98.4
  Top Layer w20: v4(2401.57,2066.93) Q1.2@2500,2066.93
  other v1: 2487.16,3107.76 2552.21,3107.76 2519.68,3169.02 2584.74,3169.02 2649.79,3169.02 2536.93,3442.68 2504.41,3503.94 2762.75,3602.65 2827.8,3602.65 2795.28,3663.91 2860.33,3663.91 1299.21,4094.49 1456.69,4094.49 1220.47,4133.86 1377.95,4133.86 1535.43,4133.86 1299.21,4173.23 1456.69,4173.23
N5V: C2.1 C5_N5V.2 C6_N5V.2 C7_N5V.2 C8_N5V.2 J4.1 J4.2 J4.3 J4.4 J4.5 J4.6 J4.7 J4.8 J4.9 J4.10 J4.11 J4.12 pad.2@3051.18,3503.94 R3.1 U1.G1 U1.G2 U1.H1 U1.H2 U1.J2 | length 265
  Bottom Layer w20: v1(2491.91,3344.02) 2494.61,3344.02 2506.43,3355.83 C2.1 2667.33,3355.83 R3.1@2710.93,3399.42 ; C2.1@2585.64,3340.12 C2.1@2601.94,3356.42
NetC1_2: C1.2 R2.2 U1.C1 | length 345.5
  Top Layer w10: v2(2398.46,3069.02) U1.C1
  Bottom Layer w20: v2(2398.46,3069.02) 2423.46,3044.02 2589.25,3044.02 C1.2 ; C1.2@2591.73,3043.5 R2.2@2700,3043.5
NetC2_2: C2.2 R4.2 U1.J1 | length 375.2
  Top Layer w10: v2(2398.46,3369.02) U1.J1
  Bottom Layer w20: v2(2398.46,3369.02) 2473.46,3294.02 C2.2@2600.17,3294.02 ; C2.2 2690.29,3292.83 2702.92,3280.2 R4.2
NetC3_2: C3.2 U1.J7 | length 209.1
  Top Layer w20: v1(2051.55,3344.02) U1.J7
  Bottom Layer w20: C3.2 1940.94,3403.54 1956.54,3387.95 1969.74,3387.95 2013.68,3344.02 v1(2051.55,3344.02)
NetC4_2: C4.2 U1.C7 | length 182.9
  Top Layer w20: v1(2051.55,3044.02) U1.C7
  Bottom Layer w20: C4.2 v1(2051.55,3044.02)
NetC17_1: C17.1 C18.1 C19.1 C20.1 pad.2@1456.69,3400.39 R10.1
NetD1_1: D1.1 R12.1 | length 378.6
  Top Layer w20: R12.1 2811.02,2176.18 2824.65,2162.56 2833.5,2162.56 2855.18,2140.89 3042.46,2140.89 D1.1
NetD1_2: D1.2 Q1.3 | length 568.2
  Top Layer w20: Q1.3@2578,2106.3 Q1.3 3090.55,2106.3 D1.2
NetD2_1: D2.1 R13.1 | length 632.9
  Top Layer w20: R13.1 2602.36,3740.16 2655.77,3793.56 2851.79,3793.56 2905.8,3847.57 3061.18,3847.57 D2.1
NetD2_2: D2.2 Q2.3 | length 494.1
  Top Layer w20: Q2.3 2659.45,3714.22 2665.2,3719.97 2667.17,3719.97 2707.03,3759.84 2869.47,3759.84 2923.58,3813.95 D2.2
NetR1_2: R1.2 R2.1 | length 133.8
  Bottom Layer w20: R1.2 2700,2976.18 R2.1@2704.33,2980.51
NetR3_2: R3.2 R4.1 | length 102.4
  Bottom Layer w20: R4.1 R3.2
NetR8_2: R8.2 U1.E7 | length 186.6
  Top Layer w20: v1(2051.55,3144.02) U1.E7
  Bottom Layer w20: R8.2 2032.08,3163.49 v1(2051.55,3144.02)
NetR9_2: R9.2 U1.G7 | length 196.6
  Top Layer w20: v1(2051.55,3244.02) U1.G7
  Bottom Layer w20: R9.2 2008.17,3287.4 v1(2051.55,3244.02)
P5V: C1.1 C5_P5V.2 C6_P5V.2 C7_P5V.2 C8_P5V.2 J2.1 J2.2 J2.3 J2.4 J2.5 J2.6 J2.7 J2.8 J2.9 J2.10 J2.11 J2.12 pad.2@3051.18,2500 R1.1 R6.2 R7.2 R12.2 R13.2 U1.A1 U1.A2 U1.B1 U1.B2 | length 1456.2
  Top Layer w20: R7.2 R7.2@2394.76,2742.43 ; R6.2 2431.89,3629.58 2378.21,3575.91 2369.76,3575.91 v3(2366.06,3572.2) 2366.06,3714.53 2389.58,3738.05 2429.78,3738.05 R13.2
  Bottom Layer w20: v3(2366.06,3572.2) 2369.76,3568.49 2369.76,3523.25 2372.69,3520.32 2372.69,3485.23 2264.27,3376.8 2264.27,3109.75 2381.89,2992.13 v3(2381.89,2817.24) ; v1(2519.68,2840.34) 2581.57,2840.34 R1.1 C1.1 2578.17,2992.1 2521.6,2992.1 v1(2519.68,2994.02)
PGOOD_N: pad.2@2273.46,3577.47 Q2.1 R6.1 U1.H6 | length 861.1
  Top Layer w10: v2(2148.46,3319.02) U1.H6 ; pad.2@2273.46,3577.47 2273.46,3576.06 2322.83,3526.69 v1(2322.83,3525.28) 2453.87,3525.28 2500.78,3572.2 ; R6.1 2500.78,3572.2 ; Q2.1 2560.73,3572.2 2500.78,3572.2
  Bottom Layer w10: v2(2148.46,3319.02) 2148.46,3469.06 2204.68,3525.28 v1(2322.83,3525.28)
PGOOD_P: pad.2@2244.09,2667.04 Q1.1 R7.1 U1.D6 | length 1259
  Top Layer w10: v2(2148.46,3119.02) U1.D6 ; pad.2@2244.09,2667.04 2254.41,2667.04 R7.1@2304.43,2717.07 ; R7.1@2302.46,2719.04 R7.1 ; v1(2317.76,2817.24) R7.1 ; Q1.1 2500,2395.83 2317.76,2578.07 R7.1
  Bottom Layer w10: v2(2148.46,3119.02) 2148.46,3116.4 2317.76,2947.1 v1(2317.76,2817.24)
SYNC2_CLKOUT1: U1.E6 U1.H7 | length 170.7
  Top Layer w10: U1.H7 v2(2148.46,3269.02) ; v2(2148.46,3169.02) U1.E6
  Bottom Layer w10: v2(2148.46,3169.02) v2(2148.46,3269.02)
Vin_filt: C9.2 C10.2 C11.2 C12.2 C13.2 C14.2 C15.2 C16.2 D3.1 L1.1 pad.2@1870.08,3602.36 R10.2 R11.2 U1.A5 U1.A6 U1.A7 U1.B7 U1.K7 U1.L5 U1.L6 U1.L7
Vin_raw: D3.2 J3.1 L1.2 pad.2@1010.62,2421.26
pads on no net: FD1.1 FD2.1 FD3.1 L1.3 U1.D7 U1.F3 U1.F4 U1.G6

## Polygon pours and split planes (outlines as drawn)
Vin_raw on Top Layer "VIN_RAW_TOP" (solid, pour order 11): 787.4,2637.8 1122.05,2637.8 1122.05,2716.54 1417.32,2716.54 1417.32,2637.8 1417.32,2165.35 787.4,2165.35
P5V on Top Layer "P5V_TOP_OUT" (solid, pour order 26): 4369.45,1771.65 4369.45,2716.54 3070.24,2716.54 2742.76,3044.02 2322.21,3044.02 2322.21,1771.65
NetC17_1 on Top Layer "VIN_TOP_DAMPING" (solid, pour order 16): 1122.05,3976.38 1200.79,4055.12 1535.43,4055.12 1535.43,2755.91 1496.06,2716.54 1122.05,2716.54
GND on Top Layer "GND_VIN_TOP" (solid, pour order 18): 1122.05,2637.8 787.4,2637.8 787.4,4330.71 2913.39,4330.71 2913.39,4055.12 1200.79,4055.12 1122.05,3976.38
GND on Top Layer "GND_FILLER_TOP" (solid, pour order 29): 2323.46,3740.16 2323.46,3369.02 2660.35,3369.02 2913.39,3622.05 2913.39,3740.16
GND on Top Layer "Top Layer-GND" (solid, pour order 27): 4370.08,2716.54 4370.08,3346.46 3090.55,3346.46 2963.11,3219.01 2322.83,3219.02 2322.83,3044.02 2743.39,3044.02 3070.87,2716.54
Vin_filt on Top Layer "VIN_FILT_TOP_BGA_A" (solid, pour order 4): 2248.46,3419.02 2148.46,3419.02 2148.46,3369.02 2098.46,3369.02 2098.46,3469.02 2248.46,3469.02
GND on Top Layer "GND_TOP_BGA" (solid, pour order 10): 2198.46,3319.02 2148.46,3319.02 2148.46,3419.02 2248.46,3419.02 2248.46,3469.02 2448.46,3469.02 2448.46,3369.02 2348.46,3369.02 2348.46,3219.02 2248.46,3219.02 2248.46,3169.02 2348.46,3169.02 2348.46,3219.02 2448.46,3219.02 2448.46,3169.02 2448.46,3069.02 2398.46,3069.02 2398.46,3019.02 2348.46,3019.02 2348.46,2969.02 2348.46,2919.02 2248.46,2919.02 2248.46,2969.02 2148.46,2969.02 2148.46,3069.02 2198.46,3069.02 2198.46,3169.02 2098.46,3169.02 2098.46,3219.02 2198.46,3219.02
Vin_filt on Top Layer "VIN_FILT_TOP_BGA_B" (solid, pour order 6): 2248.46,2969.02 2148.46,2969.02 2148.46,3019.02 2098.46,3019.02 2098.46,2919.02 2248.46,2919.02
N5V on Top Layer "N5V_TOP_BGA" (solid, pour order 8): 2448.46,3319.02 2398.46,3319.02 2398.46,3369.02 2348.46,3369.02 2348.46,3219.02 2448.46,3219.02
P5V on Top Layer "P5V_TOP_BGA" (solid, pour order 9): 2348.46,2919.02 2348.46,3019.02 2448.46,3019.02 2448.46,2919.02
Vin_filt on Top Layer "VIN_FILT_TOP_PLANE" (solid, pour order 12): 1496.06,2716.54 1417.32,2716.54 1417.32,2637.8 1417.32,2165.35 1850.39,2165.35 1850.39,2440.94 2086.61,2677.17 2323.46,2677.17 2323.46,3740.16 2913.39,3740.16 2913.39,4055.12 1535.43,4055.12 1535.43,2755.91
N5V on Top Layer "N5V_L01_P020" (solid, pour order 20): 2963.11,3219.01 2348.46,3219.02 2348.46,3369.02 2660.35,3369.02 2913.39,3622.05 2913.39,4330.71 4370.08,4330.71 4370.08,3346.46 3090.55,3346.46
GND on Bottom Layer "GND_BOT" (solid, pour order 13): 787.4,1496.06 787.4,4330.71 4370.08,4330.71 4370.08,1496.06

## Keep-outs
Keep-Out Layer:
  lines w47.24: 763.78,1692.91 ccw(c787.4,1692.91) 770.7,1676.21 ; 763.78,1692.91 ccw(c787.4,1692.91) 770.7,1676.21 ; 763.78,1692.91 763.78,4133.86 ; 763.78,4133.86 cw(c787.4,4133.86) 770.7,4150.56 ; 763.78,4133.86 cw(c787.4,4133.86) 770.7,4150.56 ; 770.7,1676.21 967.55,1479.36 ; 770.7,4150.56 967.55,4347.41 ; 967.55,1479.36 ccw(c984.25,1496.06) 984.25,1472.44 ; 967.55,1479.36 ccw(c984.25,1496.06) 984.25,1472.44 ; 967.55,4347.41 cw(c984.25,4330.71) 984.25,4354.33 ; 967.55,4347.41 cw(c984.25,4330.71) 984.25,4354.33 ; 984.25,1472.44 1968.5,1472.44 ; 984.25,4354.33 4173.23,4354.33 ; 1968.5,1472.44 ccw(c1968.5,1496.06) 1985.21,1479.36 ; 1968.5,1472.44 ccw(c1968.5,1496.06) 1985.21,1479.36 ; 1985.21,1479.36 2253.88,1748.03 4173.23,1748.03 ; 4173.23,1748.03 ccw(c4173.23,1771.65) 4189.93,1754.95 ; 4173.23,1748.03 ccw(c4173.23,1771.65) 4189.93,1754.95 ; 4173.23,4354.33 cw(c4173.23,4330.71) 4189.93,4347.41 ; 4173.23,4354.33 cw(c4173.23,4330.71) 4189.93,4347.41 ; 4189.93,1754.95 4386.78,1951.8 ; 4189.93,4347.41 4386.78,4150.56 ; 4386.78,1951.8 ccw(c4370.08,1968.5) 4393.7,1968.5 ; 4386.78,1951.8 ccw(c4370.08,1968.5) 4393.7,1968.5 ; 4386.78,4150.56 cw(c4370.08,4133.86) 4393.7,4133.86 ; 4386.78,4150.56 cw(c4370.08,4133.86) 4393.7,4133.86 ; 4393.7,1968.5 4393.7,4133.86

## Silkscreen, mask and mechanical layers (free items; w line width, h text height)
Top Overlay:
  lines w10: 1751.97,3622.05 1771.65,3602.36 1811.02,3602.36 ; 2066.93,2559.06 2125.98,2559.06 2185.04,2618.11 ; 2211.05,3759.84 2211.05,3635.41 2224.41,3622.05 ; 2659.45,2716.54 3190.94,2716.54 ; 2659.45,3344.49 3190.94,3344.49 ; 2736.22,3937.01 2736.22,4251.97 ; 3011.81,2933.07 3129.92,2933.07 ; 3011.81,3811.3 3031.5,3791.62 ; 3031.5,2148.1 3051.18,2128.42 ; 3031.5,2913.39 3110.24,2913.39 ; 3031.5,3920.61 3031.5,3791.62 ; 3051.18,2257.41 3051.18,2128.42 ; 3051.18,2893.7 3090.55,2893.7 ; 3051.18,3811.3 3031.5,3791.62 ; 3070.87,2148.1 3051.18,2128.42 ; 3070.87,2933.07 3070.87,2972.44 ; 3935.04,2718.5 4114.17,2718.5 ; 3935.04,3346.46 4114.17,3346.46
  text "N5V ---" at 3336.77,4025.75 h60
  text "TP_PGOOD_N" at 1892.84,3794.19 h40
  text "TP_VIN_FILT" at 1425.32,3636.71 h40
  text "TP_N5V" at 2763.91,3479.23 h40
  text "GND" at 2982.44,3002.13 h60
  text "TP_GND" at 834.77,2947.74 h40
  text "-" at 876.14,2854.64 h60 r180
  text "TP_PGOOD_P" at 1838.71,2494.98 h40
  text "TP_P5V" at 2763.91,2475.29 h40
  text "+" at 876.14,2440.95 h60
  text "P5V +++" at 3336.77,1978.5 h60
Bottom Overlay:
  drawing of 6 lines, arcs and shapes, not listed
  text "TP_GND" at 1980.19,2691.83 h40
  text "P5N5 / Rev. A / Evan MacDonald, 2023" at 2066.93,1751.97 h60

## Text inside footprints (layer, text, board x,y; h text height)
U1: Top Overlay "7" at 2098.46,2873.52 h50 r270; Top Overlay "1" at 2398.46,2873.52 h50 r270; Top Overlay "L" at 2500.46,3469.02 h50 r180; Top Overlay "A" at 2500.46,2969.02 h50 r180; Bottom Overlay "7" at 2148.46,2873.52 h50 r90; Bottom Overlay "1" at 2448.46,2873.52 h50 r90; Bottom Overlay "L" at 2475.46,3469.02 h50 r180; Bottom Overlay "A" at 2475.46,2969.02 h50 r180; Mechanical 13 "7" at 2098.46,2873.52 h50 r270; Mechanical 13 "1" at 2398.46,2873.52 h50 r270; Mechanical 13 "L" at 2500.46,3469.02 h50 r180; Mechanical 13 "A" at 2500.46,2969.02 h50 r180